# EAGLE board nChannel (EAGLE 9.3.0)
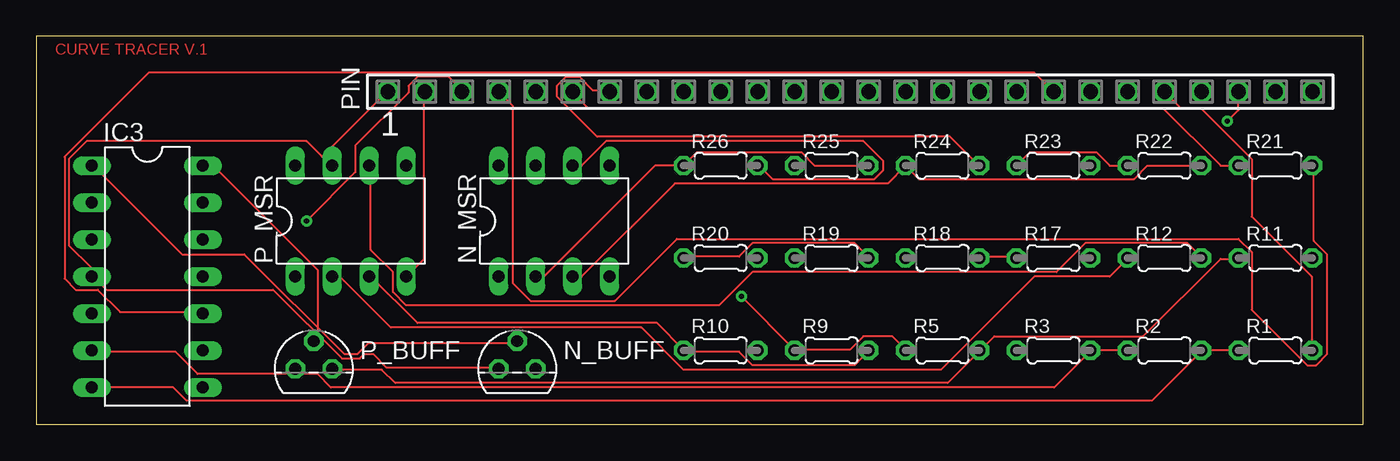
[diagram p0: board, top side]
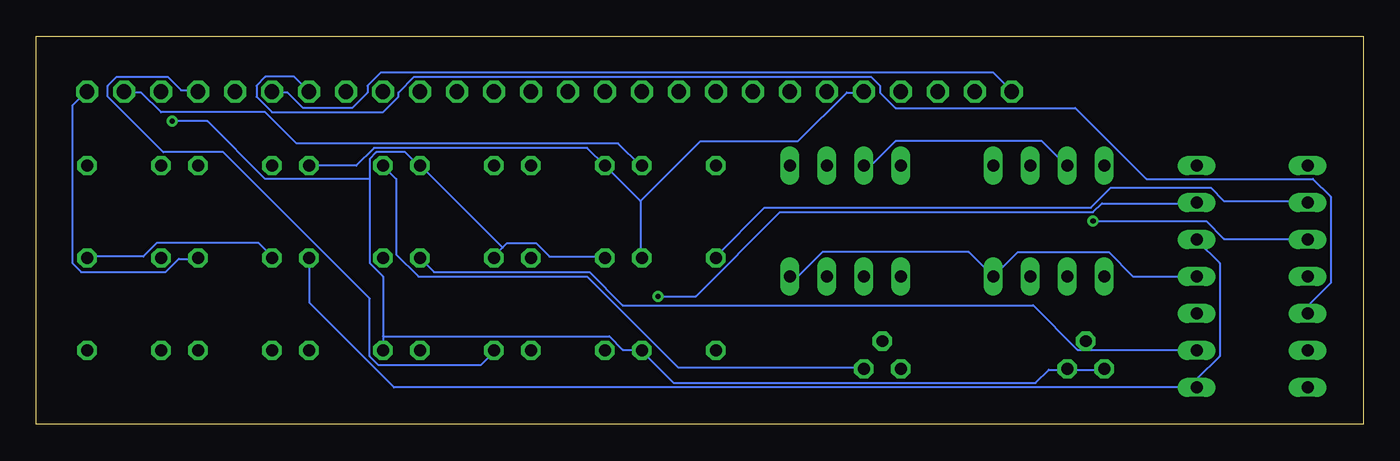
[diagram p1: board, bottom side, seen from below]

Size 91.11 x 26.66 mm. Coordinates in mm from the lower left corner, seen from the top.
Outline: 0,0 91.11,0 91.11,26.66 0,26.66 0,0
Copper layers (1*16): Top 0.035mm / dielectric 1.5mm / Bottom 0.035mm
Design rules "default": minimum track width 6mil, minimum drill 0.35mm, track to track 6mil, track to pad 6mil, pad to pad 6mil, via to via 6mil, smd to smd 6mil, copper to edge 40mil, drill to drill 6mil, minimum pad ring 10mil, minimum via ring 8mil, stop-mask expansion 4mil, vias tented up to drill 0mil, thermal gap 10mil

## Footprints (pad centres in the part's own frame; a part is rotated, then mirrored left to right if it is on the bottom)
DIL14 = drill 0.813 long: 1 -7.62,-3.81; 2 -5.08,-3.81; 3 -2.54,-3.81; 4 0,-3.81; 5 2.54,-3.81; 6 5.08,-3.81; 7 7.62,-3.81; 8 7.62,3.81; 9 5.08,3.81; 10 2.54,3.81; 11 0,3.81; 12 -2.54,3.81; 13 -5.08,3.81; 14 -7.62,3.81
TO92 = drill 0.813 octagon: 1 1.27,0; 2 0,1.905; 3 -1.27,0
DIL08 = drill 0.813 long: 1 -3.81,-3.81; 2 -1.27,-3.81; 3 1.27,-3.81; 4 3.81,-3.81; 5 3.81,3.81; 6 1.27,3.81; 7 -1.27,3.81; 8 -3.81,3.81
SSW-126-02-G-S = drill 1 pad 1.5 octagon: 1 -31.75,0; 2 -29.21,0; 3 -26.67,0; 4 -24.13,0; 5 -21.59,0; 6 -19.05,0; 7 -16.51,0; 8 -13.97,0; 9 -11.43,0; 10 -8.89,0; 11 -6.35,0; 12 -3.81,0; 13 -1.27,0; 14 1.27,0; 15 3.81,0; 16 6.35,0; 17 8.89,0; 18 11.43,0; 19 13.97,0; 20 16.51,0; 21 19.05,0; 22 21.59,0; 23 24.13,0; 24 26.67,0; 25 29.21,0; 26 31.75,0
0204/5 = drill 0.813 octagon: 1 -2.54,0; 2 2.54,0

## Placement (x,y rotation side)
IC3  MCP604P  [DIL14]  7.62,10.16 270 top
N_BUFF  [TO92]  33.02,3.81 0 top
N_MSR  AD711N  [DIL08]  35.56,13.97 0 top
P_BUFF  [TO92]  19.05,3.81 0 top
P_MSR  AD711N  [DIL08]  21.59,13.97 0 top
PIN  [SSW-126-02-G-S]  55.88,22.86 0 top
R1  10k  [0204/5]  85.09,5.08 0 top
R2  20k  [0204/5]  77.47,5.08 0 top
R3  10k  [0204/5]  69.85,5.08 0 top
R5  52  [0204/5]  62.23,5.08 0 top
R9  100k  [0204/5]  54.61,5.08 0 top
R10  100k  [0204/5]  46.99,5.08 0 top
R11  100k  [0204/5]  85.09,11.43 0 top
R12  100k  [0204/5]  77.47,11.43 0 top
R17  40k  [0204/5]  69.85,11.43 0 top
R18  10k  [0204/5]  62.23,11.43 0 top
R19  10k  [0204/5]  54.61,11.43 0 top
R20  20k  [0204/5]  46.99,11.43 0 top
R21  100k  [0204/5]  85.09,17.78 0 top
R22  100k  [0204/5]  77.47,17.78 0 top
R23  52  [0204/5]  69.85,17.78 0 top
R24  100k  [0204/5]  62.23,17.78 0 top
R25  100k  [0204/5]  54.61,17.78 0 top
R26  100k  [0204/5]  46.99,17.78 0 top

## Library data of the parts
IC3 = linear
N_BUFF P_BUFF = transistor-fet
N_MSR P_MSR = analog-devices; MPN: AD711BQ; OC_FARNELL: 9604839; OC_NEWARK: 66F5826
PIN = con-samtec; MF: Samtec Inc.; MPN: SSW-126-02-G-S; OC_FARNELL: unknown; OC_NEWARK: 11P9742
R1-R3 R9-R12 R17-R22 R24-R26 = rcl; SPICEPREFIX: R
R5 R23 = rcl; SPICEPREFIX: 52

## Nets
N$1: P_BUFF.3 PIN.7 PIN.24 R3.1 R10.2 R18.1 R19.1 R24.2
N$2: IC3.6 R2.1 R3.2
N$5: IC3.3 PIN.3
N$6: N_MSR.3 R22.2 R24.1
N$7: N_MSR.2 R25.2 R26.1
N$8: N_MSR.6 PIN.25 R26.2
N$13: IC3.7 R1.1 R2.2
N$15: IC3.9 R17.1 R18.2
N$17: PIN.6 R21.1
N$18: P_MSR.3 R9.2 R10.1
N$19: P_MSR.2 R11.2 R12.1
N$20: P_MSR.6 PIN.26 R12.2
N$21: IC3.14 P_BUFF.2
N$22: IC3.11 N_MSR.4 P_MSR.4 PIN.2
N$23: IC3.1 N_BUFF.2
N$24: IC3.2 R19.2 R20.1
N$25: N_BUFF.1 R22.1 R23.1
N$26: PIN.5 R20.2 R23.2 R25.1
N$27: PIN.4 R21.2
N$28: IC3.8 IC3.12 R17.2
N$29: P_BUFF.1 R5.2 R11.1
N$30: PIN.22 R1.2
N$31: IC3.13 PIN.23 R5.1 R9.1
N$32: IC3.4 N_BUFF.3 N_MSR.7 P_MSR.7 PIN.1 PIN.21
N$33: IC3.5 PIN.20
N$34: IC3.10 PIN.19

## Tracks (layer width: path | path; a pad name or v marks a point on that pad's centre or on a via)
N$1  (via drill 0.35)
  Top 0.152: PIN.7 39.27,22.96 38.2,22.96 37.29,23.88 36.37,23.88 35.76,23.27 35.76,22.5 38.51,19.76 62.74,19.76 64.72,17.78 R24.2 | PIN.24 82.55,21.59 v81.79,20.83
  Bottom 0.152: P_BUFF.3 17.83,3.76 21.59,3.76 22.5,2.84 47.35,2.84 49.48,4.98 R10.2 49.63,5.13 50.85,5.13 51.77,6.05 67.31,6.05 | 59.08,12.14 59.69,11.53 R18.1 | 59.08,12.14 58.78,12.45 56.79,12.45 55.88,11.53 52.07,11.53 R19.1 | 67.31,6.05 67.31,10.16 68.22,11.07 68.22,16.87 | 67.31,6.05 R3.1 | 68.22,16.87 68.22,18.24 67.77,18.69 65.79,18.69 64.87,17.78 R24.2 64.72,17.78 59.08,12.14 | v81.79,20.83 79.35,20.83 75.39,16.87 68.22,16.87
N$2
  Top 0.152: IC3.6 3.91,4.98 9.55,4.98 11.07,3.45 19.3,3.45 20.22,2.54 69.9,2.54 72.34,4.98 R3.2 72.49,5.13 74.93,5.13 R2.1
N$5  (via drill 0.35)
  Top 0.152: v18.54,13.97 21.89,17.32 21.89,19.15 25.55,22.81 25.55,23.27 26.16,23.88 28.3,23.88 29.21,22.96 PIN.3
  Bottom 0.152: v18.54,13.97 10.77,13.97 9.55,12.75 3.91,12.75 IC3.3
N$6
  Top 0.152: N_MSR.3 37.44,10.16 43.84,16.56 58.47,16.56 R24.1 60.6,16.87 75.39,16.87 76.3,17.78 R22.2
N$7
  Top 0.152: N_MSR.2 34.85,10.16 42.47,17.78 R26.1 45.36,18.69 52.53,18.69 53.44,17.78 R25.2
N$8
  Top 0.152: N_MSR.6 37.44,17.78 39.12,19.46 56.79,19.46 58.17,18.08 58.17,17.47 57.56,16.87 50.55,16.87 49.63,17.78 R26.2
  Bottom 0.152: PIN.25 84.99,22.81 83.92,22.81 82.55,21.44 75.39,21.44 73.25,19.3 51.16,19.3 49.63,17.78 R26.2
N$13
  Top 0.152: IC3.7 9.4,2.54 10.31,1.63 76.61,1.63 79.96,4.98 R2.2 80.11,5.13 82.55,5.13 R1.1
N$15
  Top 0.152: R17.1 67.31,11.53 64.87,11.53 R18.2
  Bottom 0.152: R18.2 63.8,10.47 53.14,10.47 50.85,8.18 22.66,8.18 19.61,5.13 11.53,5.13 IC3.9
N$17
  Top 0.152: R21.1 81.33,17.78 77.37,21.74 37.9,21.74 36.83,22.81 PIN.6
N$18
  Top 0.152: R9.2 57.1,4.98 56.19,4.06 49.17,4.06 48.26,4.98 44.45,4.98 R10.1 44.45,5.13 42.62,6.96 26.16,6.96 22.96,10.16 P_MSR.3
N$19
  Top 0.152: P_MSR.2 20.83,10.16 24.33,6.66 41.55,6.66 44.45,3.76 62.13,3.76 68.53,10.16 73.71,10.16 74.93,11.38 R12.1
  Bottom 0.152: R11.2 87.58,11.53 83.77,11.53 82.86,12.45 75.84,12.45 74.93,11.53 R12.1
N$20
  Top 0.152: P_MSR.6 22.96,17.78 22.96,11.99 24.49,10.47 24.49,9.09 25.4,8.18 46.89,8.18 49.17,10.47 70.05,10.47 72.03,12.45 79.05,12.45 79.96,11.53 R12.2
  Bottom 0.152: R12.2 80.11,11.38 81.33,11.38 82.25,10.47 88.04,10.47 88.65,11.07 88.65,21.89 87.73,22.81 PIN.26
N$21
  Top 0.152: IC3.14 12.14,17.78 19.3,10.62 19.3,5.97 P_BUFF.2
N$22
  Top 0.152: P_MSR.4 26.62,11.38 26.62,22.81 PIN.2
  Bottom 0.152: IC3.11 15.8,10.16 17.47,11.84 23.72,11.84 P_MSR.4 27.08,11.84 37.13,11.84 38.81,10.16 N_MSR.4
N$23
  Top 0.152: N_BUFF.2 32.92,5.59 22.81,5.59 22.05,4.83 21.13,4.83 14.27,11.68 10.01,11.68 3.91,17.78 IC3.1
N$24
  Top 0.152: R20.1 44.45,11.53 48.26,11.53 49.17,12.45 56.19,12.45 57.1,11.53 R19.2
  Bottom 0.152: IC3.2 3.91,15.34 9.55,15.34 10.46,16.26 17.32,16.26 18.69,14.88 41.1,14.88 44.45,11.53 R20.1
N$25
  Top 0.152: R22.1 73.71,17.78 72.8,18.69 68.22,18.69 R23.1
  Bottom 0.152: R23.1 66.4,16.87 66.4,11.68 64.87,10.16 53.29,10.16 47.04,3.91 34.29,3.91 N_BUFF.1
N$26
  Bottom 0.152: 49.63,15.34 49.63,11.53 R20.2 | 49.63,15.34 R25.1 53.29,19 67.92,19 69.14,17.78 R23.2 | 49.63,15.34 45.52,19.46 38.81,19.46 35.46,22.81 34.39,22.81 PIN.5
N$27
  Top 0.152: PIN.4 32.71,21.89 32.71,9.7 33.93,8.48 39.73,8.48 43.99,12.75 82.55,12.75 83.46,11.84 83.46,7.87 87.27,4.06 87.88,4.06 88.65,4.83 88.65,11.68 87.73,12.6 87.73,17.78 R21.2
N$28
  Bottom 0.152: IC3.12 11.38,12.6 9.86,11.07 9.86,4.67 11.38,3.15 11.38,2.54 IC3.8 66.55,2.54 72.34,8.33 72.34,11.38 R17.2
N$29
  Top 0.152: P_BUFF.1 20.42,3.76 23.72,3.76 24.64,2.84 62.59,2.84 64.72,4.98 R5.2 64.87,5.13 65.79,6.05 76,6.05 81.33,11.38 82.55,11.38 R11.1
N$30
  Top 0.152: PIN.22 78.59,21.74 79.96,21.74 83.46,18.24 83.46,14.28 87.58,10.16 87.58,5.13 R1.2
N$31  (via drill 0.35)
  Top 0.152: 52.07,5.13 55.88,5.13 56.79,6.05 58.78,6.05 59.69,5.13 R5.1 | 52.07,5.13 v48.41,8.79 | 52.07,5.13 R9.1
  Bottom 0.152: v48.41,8.79 45.82,8.79 40.03,14.58 18.54,14.58 17.93,15.19 11.53,15.19 IC3.13 | PIN.23 80.11,22.96 81.18,22.96 82.09,23.88 85.6,23.88 86.21,23.27 86.21,22.5 82.4,18.69 78.28,18.69 68.22,8.64 68.22,4.67 67.61,4.06 60.6,4.06 59.69,4.98 R5.1
N$32
  Top 0.152: 19.61,18.39 20.22,17.78 P_MSR.7 | 19.61,18.39 18.54,19.46 3.45,19.46 2.23,18.24 2.23,12.29 3.76,10.77 3.76,10.16 IC3.4 3.91,10.16 4.83,9.25 16.26,9.25 20.98,4.52 22.2,4.52 22.5,4.83 23.11,4.83 24.03,3.91 31.7,3.91 N_BUFF.3 | 19.61,18.39 24.03,22.81 PIN.1
  Bottom 0.152: N_MSR.7 33.78,17.78 32.11,19.46 22.05,19.46 20.37,17.78 P_MSR.7 | PIN.21 74.93,22.81 73.86,22.81 72.8,21.74 69.44,21.74 68.38,22.81 68.38,23.27 67.46,24.18 25.4,24.18 24.18,22.96 PIN.1
N$33
  Bottom 0.152: PIN.20 73.41,23.88 75.39,23.88 76,23.27 76,22.5 74.93,21.44 67.31,21.44 66.24,22.5 66.24,22.81 65.18,23.88 33.78,23.88 33.17,23.27 33.17,22.81 32.11,21.74 19.76,21.74 14.88,16.87 3.45,16.87 2.23,15.65 2.23,9.7 3.76,8.18 3.76,7.72 IC3.5
N$34
  Top 0.152: PIN.19 68.53,24.18 7.72,24.18 1.93,18.39 1.93,10.01 2.69,9.25 4.22,9.25 5.74,7.72 11.38,7.72 IC3.10

## Text on the board
Top: CURVE TRACER V.1